# Altium PCB SPI-无WIFF3P6I.PCBDOC
Units mm, origin at the board's own origin, x right, y up, seen from the top; angles counter-clockwise.
Board outline 65.79 x 83.95 mm, 2 copper layers (Top Layer, Bottom Layer); 37 components, 28 nets, 131 pads, 33 vias.
Unrouted connection lines stored in the file: 2.
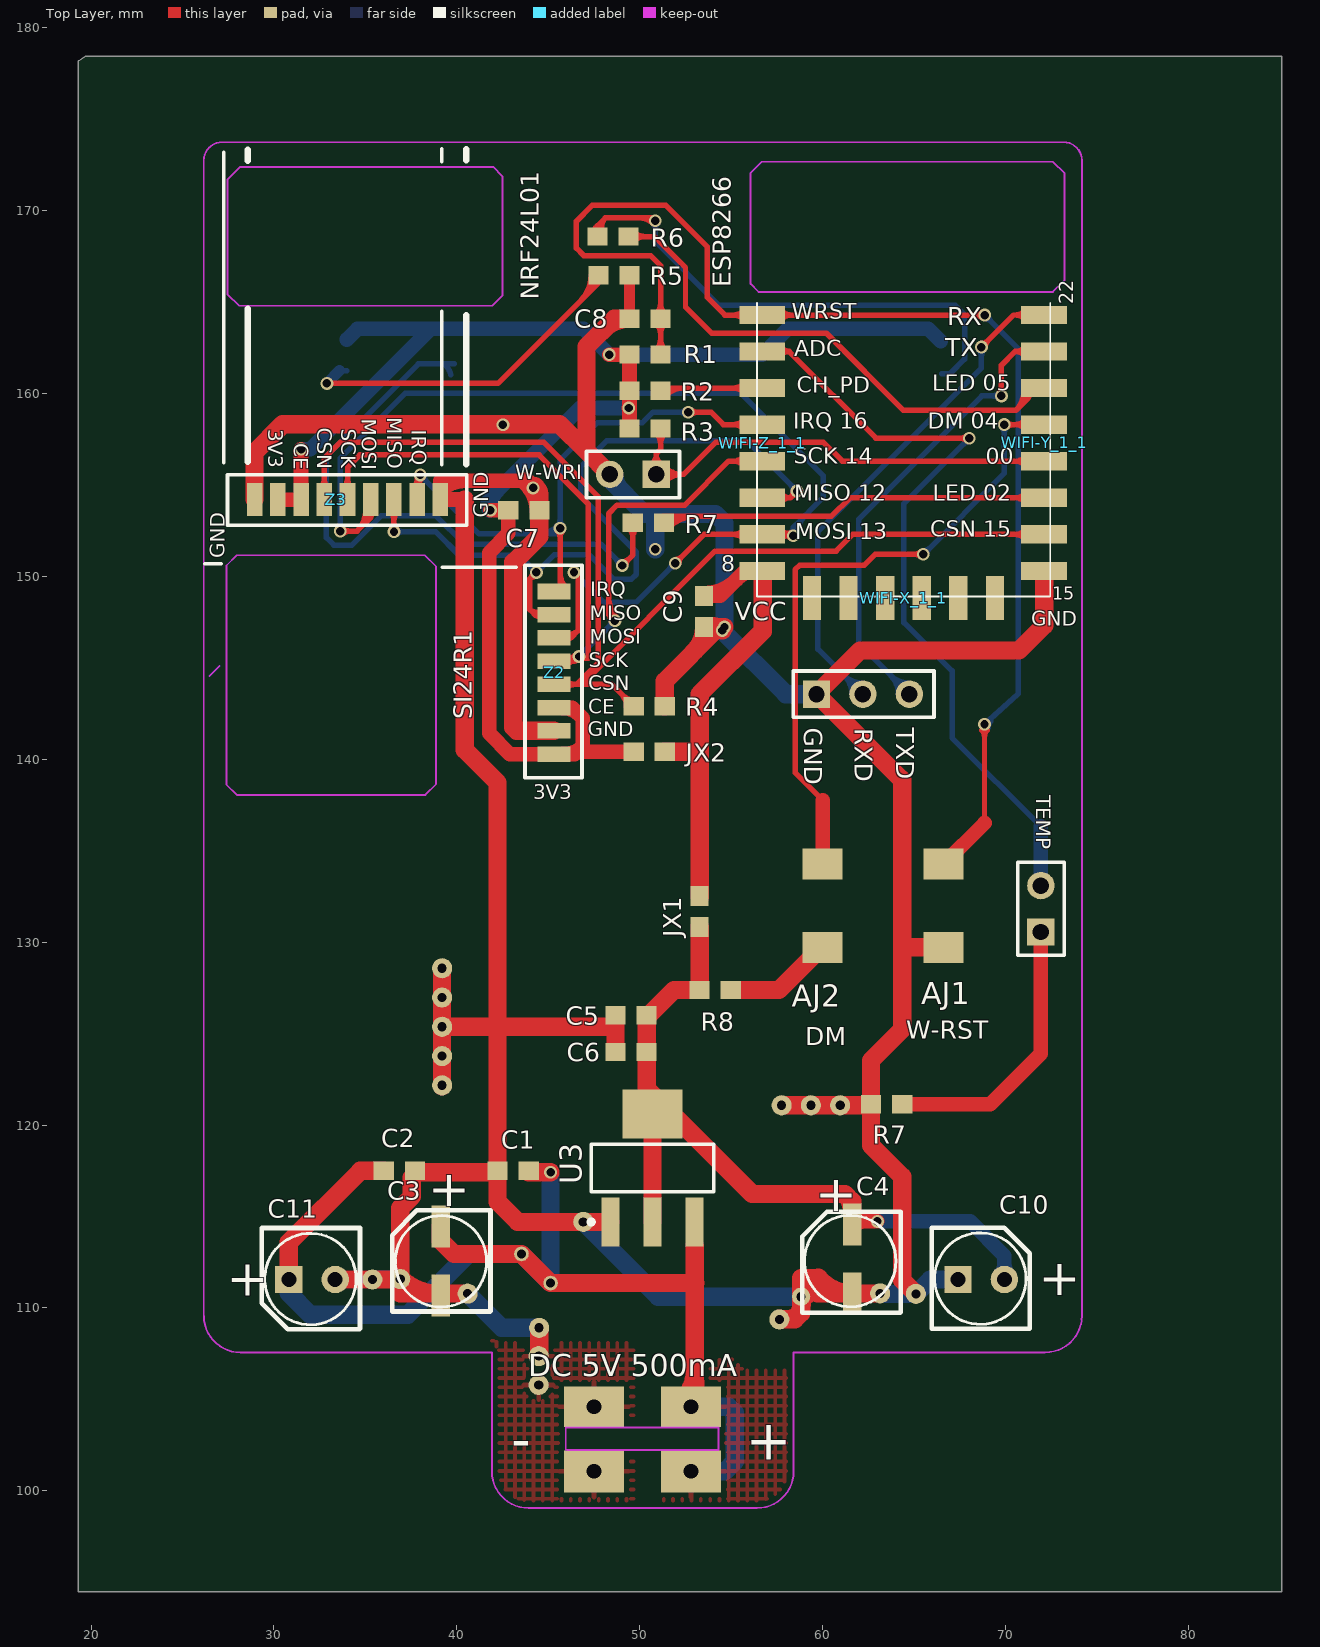
[diagram p0: Top Layer view]
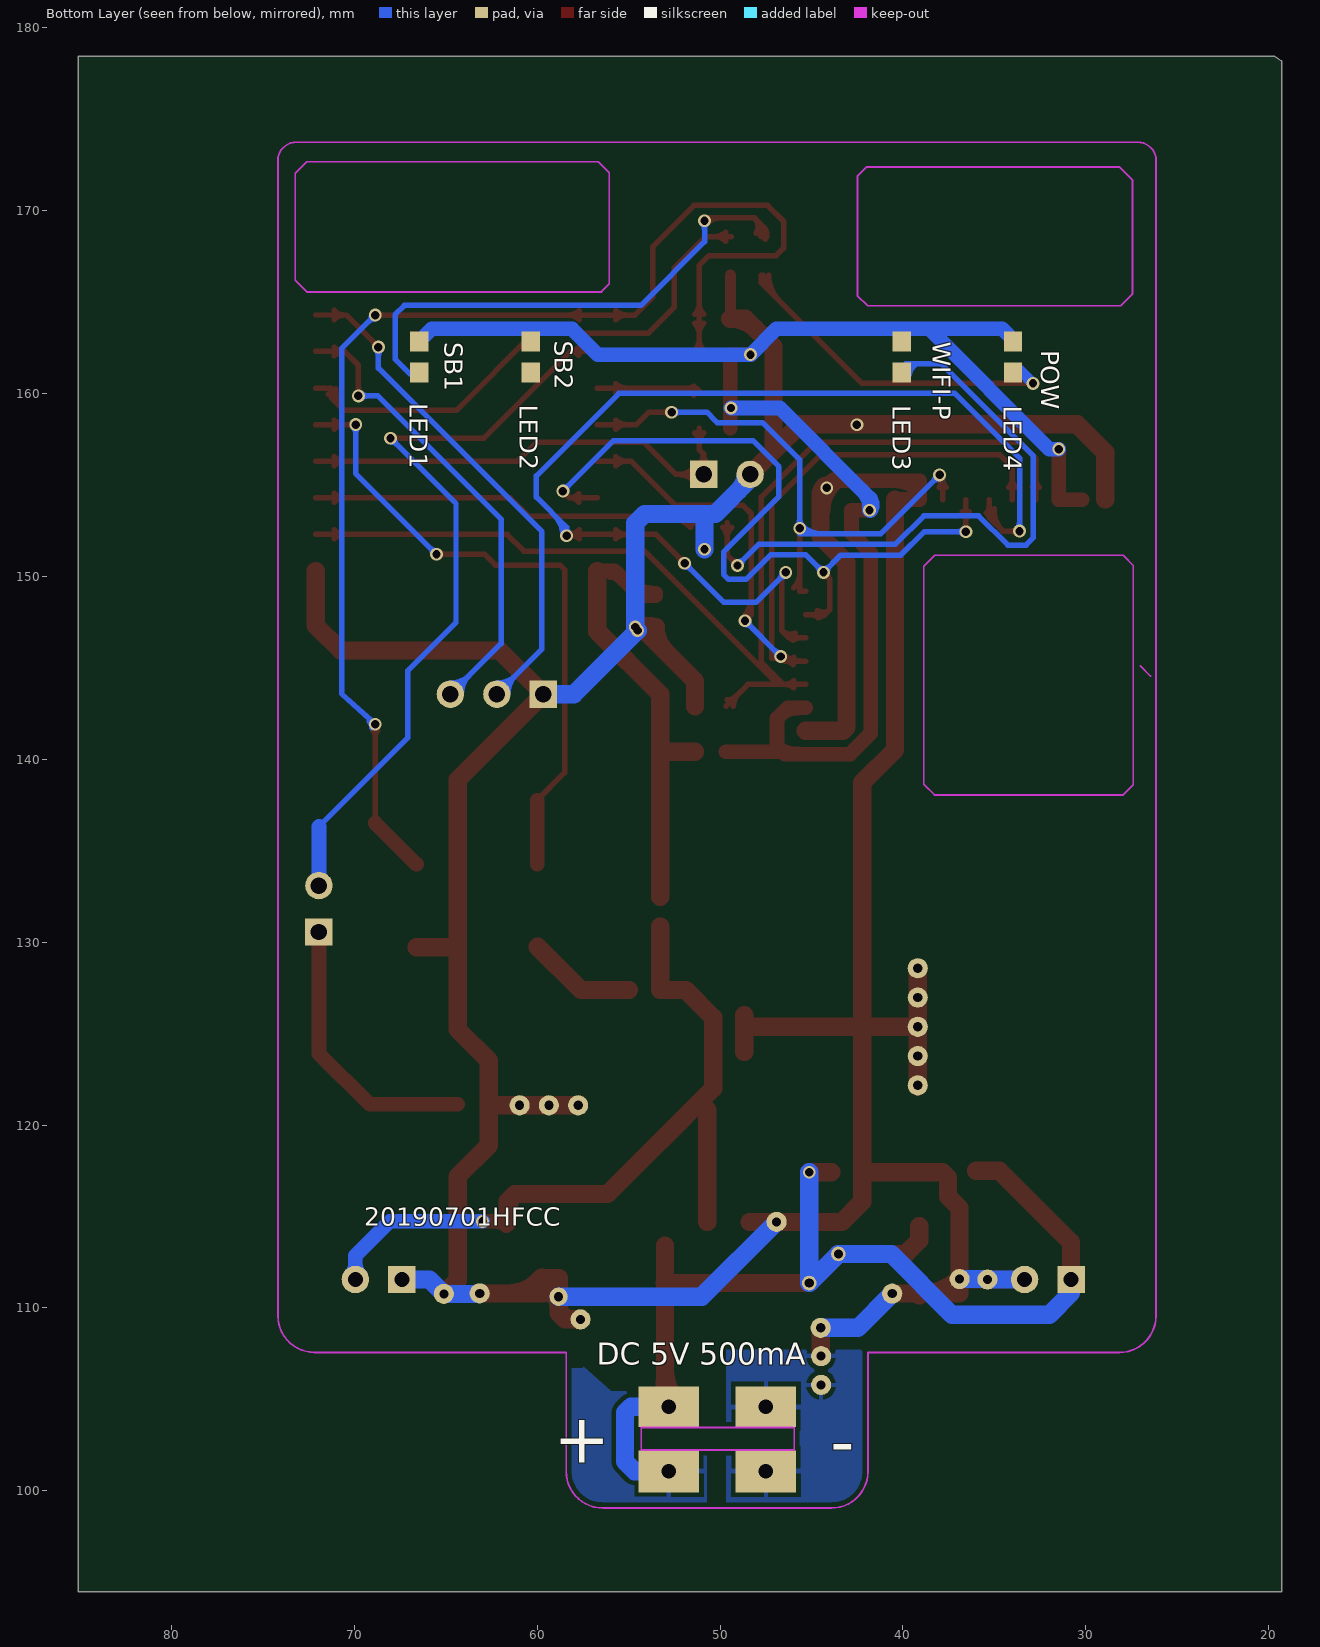
[diagram p1: Bottom Layer view, seen from below]

## Layer stack, top to bottom
Top Layer: signal copper 0.0356
Dielectric: dielectric 0.32, FR-4, Dk 4.8
Bottom Layer: signal copper 0.0356

## Board outline
19.685,178.435 85.09,178.435 85.09,94.488 19.304,94.488 19.304,178.181

## Design rules (kind name [scope] priority, off if disabled: settings)
Clearance [All] p1: gap=0.254
FabricationTestPointUsage TestPointUsage [All] p1: valid=0 allowmultiple=FALSE
FabricationTestpoint Testpoint [All] p1: side=3 testpointundercomponent=TRUE minsize=1.016 maxsize=2.54 preferedsize=1.524 minholesize=0 maxholesize=1.016 preferedholesize=0.813 testpointgrid=0.025 allowsidetop=TRUE allowsidebottom=TRUE usegrid=TRUE gridtolerance=0
PolygonConnect [All] p1: connectstyle=Relief reliefconductorwidth=0.254 reliefentries=4 polygonreliefangle="90 Angle"
RoutingVias [All] p1: holewidth=0.46 width=0.7 viastyle="Through Hole" minholewidth=0.4 minwidth=0.7 maxholewidth=0.8 maxwidth=1
SilkscreenOverComponentPads [All] p1: minsilkscreentomaskgap=0.254
SolderMaskExpansion [All] p1: expansion=0.102
Width Width_1 [InNet('3.3V')] p1: maxlimit=1 minlimit=0.254 preferedwidth=0.5 minimp=50.000000 maximp=50.000000 favimp=50.000000
Width Width_7 [InNet('3V3')] p2: maxlimit=1 minlimit=0.254 preferedwidth=0.8 minimp=50.000000 maximp=50.000000 favimp=50.000000
Width Width_4 [InNet('GND')] p3: maxlimit=1 minlimit=0.254 preferedwidth=1 minimp=50.000000 maximp=50.000000 favimp=50.000000
Width Width_3 [InNet('5V')] p4: maxlimit=1 minlimit=0.254 preferedwidth=1 minimp=50.000000 maximp=50.000000 favimp=50.000000
Width [All] p5: maxlimit=1 minlimit=0.254 preferedwidth=0.3 minimp=50.000000 maximp=50.000000 favimp=50.000000
25 further rules are at their usual default settings.

## Components (designator, comment, footprint, x,y, rotation, side; value= is the part's Value field where it differs from the comment)
AJ1 "3*4*2小龟按钮" HDR1X2#1 68.605,135.865 r90 top locked (schematic designator FW)
AJ2 "3*4*2小龟按钮" HDR1X2#1 62.001,135.865 r90 top (schematic designator FW)
C1 "10uf" CR1608-0603 43.078,117.5 r180 top
C2 "0.1uf" CR1608-0603 36.855,117.5 r0 top (schematic designator C3)
C3 "220uf" CC3216-1206 39.5,113.9 r270 top locked (schematic designator C6)
C4 "220uf" CC3216-1206 62,114 r270 top locked (schematic designator C3)
C5 "10uf" CR1608-0603 49.53,126 r180 top locked
C6 "0.1uf" CR1608-0603 49.53,124 r180 top (schematic designator C4)
C7 "0.01uf" CR1608-0603 43.663,153.619 r180 top
C8 "0.1uf" CR1608-0603 50.292,164.084 r180 top
C9 "0.01uf" CR1608-0603 53.518,148.082 r270 top
C10 "220uf" HDR1X2#2 67.4,111.557 r0 top locked (schematic designator C6)
C11 "220uf" HDR1X2#2 30.81,111.557 r0 top locked (schematic designator C6)
JX1 "0.1uf" CR1608-0603 53.264,131.674 r270 top (schematic designator C4)
JX2 "0.1uf" CR1608-0603 50.521,140.411 r180 top (schematic designator C4)
LED1 "SB1" CR1608-0603 66.456,162 r90 bottom locked
LED2 "SB2" CR1608-0603 60.36,162 r90 bottom
LED3 "WIFI-P" CR1608-0603 40.072,162 r90 bottom
LED4 "POW" CR1608-0603 33.985,162 r90 bottom locked
R1 "10K" CR1608-0603 50.292,162.128 r180 top
R2 "10K" CR1608-0603 50.292,160.147 r180 top
R3 "10K" CR1608-0603 50.292,158.09 r0 top
R4 "10K" CR1608-0603 50.521,142.9 r180 top
R5 "4.7K" CR1608-0603 48.59,166.472 r0 top
R6 "4.7K" CR1608-0603 48.539,168.58 r180 top
R7 "4.7K" CR1608-0603 63.5,121.133 r180 top
R7 "4.7K" CR1608-0603 50.47,152.933 r0 top
R8 "4.7K" CR1608-0603 54.127,127.381 r0 top
TEMP "" HDR1X2#3 71.933,130.556 r90 top
U3 "AMS1117-3.3" SOT223_M 50.698,117.653 r90 top locked (schematic designator U4)
W-WRI "" HDR1X2#3 50.902,155.575 r180 top
WIFI-X_1_1 "" MHDR1X8#1 59.959,148.815 r0 top
WIFI-Y_1_1 "" MHDR1X8#2 72.104,164.291 r270 top
WIFI-Z_1_1 "" MHDR1X8#3 56.706,164.287 r270 top locked
Z2 "SI24R1" MHDR1X8#4 45.314,149.174 r270 top
Z3 "NRF24L01" MHDR1X8#4 37.832,154.198 r180 top locked
? "" HDR1X4 59.665,143.561 r0 top

## Footprints (in the part's own frame and the unit in brackets; to place one, negate y for a bottom-side part, rotate by r counter-clockwise, add the part's x,y. Pads: shape width x height; smd on the part's side, far side on the other; paste and mask are expansions set on the pad)
CC3216-1206 [mm]
  rect 2.3x1 smd: 1(-0.562,-0.386) 2(3.213,-0.386)
CR1608-0603 [mm] "Chip Resistor; Body 1.6 x 0.8 mm (LxW typ)"
  rect 1.1x1 smd: 1(-0.85,0) 2(0.85,0)
HDR1X2#1 [mm]
  rect 1.7x2.2 smd: 1(-6.147,2.004) 2(-1.6,2.004)
HDR1X2#2 [mm] "Connector;"
  rect 1.5x1.5 hole 0.82: 1(0,0)
  round 1.5 hole 0.82: 2(2.54,0)
HDR1X2#3 [mm] "Connector; Header; 2 Position"
  rect 1.5x1.5 hole 0.9: 1(0,0)
  round 1.5 hole 0.9: 2(2.54,0)
  silkscreen extent -1.27,-1.27 3.81,1.27
HDR1X4 [mm] "Connector; Header; 3 Position"
  rect 1.5x1.5 hole 0.9: 1(0,0)
  round 1.5 hole 0.9: 2(2.54,0) 3(5.08,0)
  silkscreen extent -1.27,-1.27 6.43,1.27
MHDR1X8#1 [mm] "Connector; Header; 8 Position"
  rect 1x2.4 smd: 9(-0.54,0) 10(1.46,0) 11(3.46,0) 12(5.46,0) 13(7.46,0) 14(9.46,0)
MHDR1X8#2 [mm] "Connector; Header; 8 Position"
  rect 1x2.5 smd: 15(13.993,0) 16(11.993,0) 17(9.993,0) 18(7.993,0) 19(5.993,0) 20(3.993,0) 21(1.993,0) 22(0,0)
MHDR1X8#3 [mm] "Connector; Header; 8 Position"
  rect 1x2.5 smd: 1(0,0) 2(1.989,0) 3(3.989,0) 4(5.989,0) 5(7.989,0) 6(9.989,0) 7(11.989,0) 8(13.99,0)
MHDR1X8#4 [mm] "Connector; Header; 8 Position"
  rect 0.85x1.8 smd: 1(0,0) 2(1.27,0) 3(2.54,0) 4(3.81,0) 5(5.08,0) 6(6.35,0) 7(7.62,0) 8(8.89,0)
  silkscreen extent -1.43,-1.59 10.19,1.53
SOT223_M [mm] "SOT223, 4-Leads, Body 6.5x3.5mm, Pitch 2.3mm, Lead Span 7mm, IPC Low Dens"
  rect 2.7x1 smd: 1(-2.95,2.3) 2(-2.95,0) 3(-2.95,-2.3)
  rect 2.7x3.3 smd: 4(2.95,0)
  silkscreen extent -3.07,-3.35 1.3,3.47, body extent -1.85,-3.35 1.85,3.35, height 1.7

## Part data
C2 C6 JX1 JX2: library part "Cap Semi", "Capacitor (Semiconductor SI"
C3 C4: library part "Cap Pol1", "Polarized Capacitor (R"
C10 C11: library part "Cap Pol1", "Polarized Capacitor (Radial)"
U3: library part QNPN, "NPN Bipolar Transistor"

## Free pads (board coordinates)
  rect 0.85x1.8 smd: 0(39.091,154.203)
  rect 3.3x2.3 hole 0.8: 1(47.5,101.07) 1(52.8,101.07)
  rect 3.3x2.2 hole 0.8: 1(47.5,104.6) 1(52.8,104.6)
  round 1.1 hole 0.5: 5(35.382,111.557) 5(36.906,111.582) 5(40.589,110.787) 5(44.475,105.791) 5(44.475,107.366) 5(44.499,108.915) 5(57.633,109.372) 5(63.144,110.795) 5(65.1,110.769) 6(39.192,122.175) 6(46.914,114.706) 6(60.959,121.082) 7(39.192,123.775) 7(59.359,121.082) 8(39.192,125.375) 8(57.759,121.082) 9(39.192,126.975) 10(39.192,128.575)
  round 0.8 hole 0.5: 5(43.534,112.954) 5(45.124,111.363)
  round 1 hole 0.5: 5(58.826,110.617)

## Via types
v1: diameter 0.7, hole 0.46, Top Layer to Bottom Layer, 33 vias

## Nets (pads, with @x,y where several pads share a name; then routed paths per layer and width w, separated by ;. In a path a pad name is that pad's centre, name@x,y a point inside that pad or via, vN(x,y) a via of type N, cw(c..) or ccw(c..) an arc to the next point about the centre after c; other vN are vias at no path point)
3V3: C4.1 C5.1 C6.1 C7.2 C9.1 C10.2 JX1.1 JX1.2 JX2.1 JX2.2 LED1.2 LED2.2 LED3.2 LED4.2 R1.2 R2.2 R3.1 R8.1 U3.2 U3.4 WIFI-Z_1_1.8 Z2.6 Z2.8 Z3.6 Z3.7 | length 166.6
  Top Layer w0.8: Z3.7 Z3.6 v1(31.482,156.958) ; v1(41.834,153.619) C7.2 42.813,152.349 41.766,151.302 41.766,141.419 42.901,140.284 Z2.8 46.457,140.284 ; Z2.6 46.304,142.824 46.888,142.24 46.888,140.411 ; Z2.6@45.789,142.799 cw(c45.789,141.494) 46.711,142.417 ; Z2.8@45.79,140.309 ccw(c45.896,141.708) 46.888,140.716 ; 46.66,140.411 JX2.2@49.682,140.411 ; v1(48.336,162.128) R1.2 R2.2 v1@49.442,159.207 ; v1(49.403,159.207) v1@49.442,159.207 ; R3.1 v1@49.442,159.207 ; C9.1 54.407,148.932 55.772,150.297 WIFI-Z_1_1.8 WIFI-Z_1_1.8@56.718,150.297 ; C9.1@53.518,149.082 ccw(c53.518,151.59) 55.291,149.817 ; WIFI-Z_1_1.8@55.471,149.997 cw(c55.956,149.512) WIFI-Z_1_1.8@55.956,150.197 ; C4.1 61.614,114.732 v1(62.992,114.732) ; C4.1@61.685,114.491 cw(c62.265,113.911) 62.265,114.732
  Top Layer w1: U3.2 U3.4 50.698,120.828 U3.4@51.076,121.206 ; JX2.1 53.252,140.411 ; 53.269,119.114 50.38,122.004 C6.1 50.38,125.882 51.879,127.381 R8.1 JX1.2@53.277,130.861 ; JX1.1@53.277,132.486 53.277,143.561 56.718,147.002 WIFI-Z_1_1.8@56.718,150.297 ; 53.283,119.101 56.153,116.23 61.214,116.23 ; C4.1@61.614,114.732 61.614,115.83 61.214,116.23 ; C4.1@61.614,115.212 ccw(c60.246,115.263) 61.214,116.23
  Bottom Layer w0.8: v1(31.482,156.958) 31.99,156.958 38.567,163.535 ; LED4.2@33.985,162.95 34.57,163.535 46.929,163.535 v1(48.336,162.128) 56.693,162.128 58.1,163.535 65.771,163.535 LED1.2 ; v1@41.784,153.619 cw(c43.319,153.619) 42.233,154.705 ; v1@41.795,153.588 cw(c42.214,153.925) 41.834,154.305 ; v1(41.834,153.619) 41.834,154.305 ; v1(49.403,159.207) 46.736,159.207 41.834,154.305 ; v1(62.992,114.732) 68.072,114.732 69.94,112.864 C10.2 ; C10.2@69.693,111.804 ccw(c69.095,112.402) 69.94,112.402 ccw(c70.785,112.402) C10.2@70.188,111.804
5V: C1.1 C2.1 C3.1 C11.1 pad.1@52.8,101.07 pad.1@52.8,104.6 pad.5@43.534,112.954 pad.5@45.124,111.363 U3.3 | length 70
  Top Layer w1: C11.1 30.81,113.589 34.722,117.5 C2.1 ; C3.1 39.114,113.692 39.853,112.954 43.534,112.954 45.124,111.363 53.035,111.363 ; C1.1@43.928,117.424 v1(45.124,117.424) ; pad.1@52.376,105.024 ccw(c50.844,106.556) 53.01,106.556 ; pad.1@52.511,105.126 ccw(c52.049,105.969) 53.01,105.969 ; pad.1@52.534,105.138 ccw(c52.137,105.944) 53.035,105.944 ; pad.1@52.8,104.6 53.035,104.6 53.035,105.944 ; U3.3@53.01,113.42 53.01,105.969 ; 53.01,105.969 53.035,105.944
  Bottom Layer w1: C11.1 30.81,110.82 32.004,109.626 37.313,109.626 40.64,112.954 43.534,112.954 45.124,111.363 v1(45.124,117.424) ; pad.1@52.8,101.07 54.664,101.07 55.194,101.6 55.194,104.27 54.864,104.6 pad.1@52.8,104.6
ADC: TEMP.2 WIFI-Z_1_1.2 | length 44.9
  Top Layer w0.3: WIFI-Z_1_1.2 58.174,162.298 ; WIFI-Z_1_1.2@57.731,162.083 cw(c58.174,161.736) 58.174,162.298 ; WIFI-Z_1_1.2@57.731,162.514 ccw(c58.174,162.86) 58.174,162.298 ; v1@67.88,157.415 ccw(c67.538,157.073) 67.538,157.556 ccw(c67.538,158.039) v1@67.88,157.698 ; v1(68.021,157.556) 62.916,157.556 58.174,162.298
  Bottom Layer w0.3: v1@67.821,157.556 cw(c67.338,157.556) 67.68,157.215 cw(c68.021,156.873) v1@68.021,157.356 ; v1(68.021,157.556) 64.44,153.975 64.44,147.472 67.081,144.831 67.081,141.173 71.933,136.322
  Bottom Layer w0.8: TEMP.2 71.933,136.322
CH_PD: R2.1 WIFI-Z_1_1.3 | length 8.8
  Top Layer w0.3: R2.1 51.293,160.298 WIFI-Z_1_1.3 ; R2.1@51.227,160.112 cw(c51.678,159.661) R2.1@51.678,160.298 ; R2.1@51.439,159.9 cw(c52.402,158.937) 52.402,160.298 ; R2.1@51.439,160.394 ccw(c51.672,160.627) R2.1@51.672,160.298 ; WIFI-Z_1_1.3@55.708,160.051 ccw(c55.111,159.453) 55.111,160.298 ccw(c55.111,161.143) WIFI-Z_1_1.3@55.708,160.546
CS-W: WIFI-X_1_1.9
CSN: R4.2 WIFI-Y_1_1.16 Z2.5 Z3.5 | length 67.8
  Top Layer w0.3: Z3.5@32.558,154.868 ccw(c32.089,155.337) 32.752,155.337 ccw(c33.416,155.337) Z3.5@32.947,154.868 ; Z3.5 32.752,156.464 33.616,157.328 44.755,157.328 47.739,154.343 47.739,145.288 46.546,144.094 ; Z2.5 46.546,144.094 ; Z2.5@45.983,143.9 cw(c46.453,143.43) 46.453,144.094 cw(c46.453,144.758) Z2.5@45.983,144.289 ; 48.988,143.583 cw(c48.305,142.9) R4.2@49.271,142.9 ; 49.108,143.463 ccw(c49.621,143.975) R4.2@49.621,143.25 ; R4.2 48.477,144.094 46.838,144.094 ; WIFI-Y_1_1.16@71.106,152.051 ccw(c70.509,151.453) 70.509,152.298 ccw(c70.509,153.143) WIFI-Y_1_1.16@71.106,152.546 ; WIFI-Y_1_1.16 61.646,152.298 60.731,151.384 54.127,151.384 46.838,144.094 ; 46.546,144.094 46.838,144.094
GND: ?.1 AJ1.1 C1.2 C2.2 C3.2 C4.2 C5.2 C6.2 C7.1 C8.2 C9.2 C10.1 C11.2 pad.0 pad.1@47.5,101.07 pad.1@47.5,104.6 pad.5@35.382,111.557 pad.5@36.906,111.582 pad.5@40.589,110.787 pad.5@44.475,105.791 pad.5@44.475,107.366 pad.5@44.499,108.915 pad.5@57.633,109.372 pad.5@58.826,110.617 pad.5@63.144,110.795 pad.5@65.1,110.769 pad.6 pad.7 pad.8 pad.9 pad.10 R4.1 R5.2 R7.2@62.65,121.133 U3.1 W-WRI.2 WIFI-Y_1_1.15 Z2.7 Z3.8 | length 289.8
  Top Layer w0.6: 49.44,165.254 R5.2 ; C8.2 49.442,165.252
  Top Layer w0.8: pad.0@39.108,154.661 cw(c40.457,153.312) 40.457,155.219 ; 40.437,154.203 pad.0 39.091,155.219 43.725,155.219 cw(c43.725,154.704) v1@44.218,154.853 ; 43.371,155.219 cw(c43.371,154.039) v1@44.206,154.874
  Top Layer w1: Z3.8 28.942,156.781 30.48,158.318 45.618,158.318 47.084,156.853 ; C11.2 pad.5@36.906,111.557 ; pad.5@36.942,111.618 ccw(c38.928,113.604) C3.2@38.928,110.795 ; C3.2 C3.2@39.114,110.787 ; pad.6@39.192,122.116 39.192,122.175 39.192,123.775 pad.8@39.192,125.375 ; pad.10 pad.9 pad.8@39.192,125.375 ; 40.437,154.203 40.437,140.513 42.228,138.721 42.228,125.375 ; pad.5@40.589,110.787 C3.2@39.114,110.787 ; 43.725,155.219 44.513,154.432 C7.1 44.513,152.194 43.089,150.771 43.089,141.747 43.282,141.554 Z2.7 ; 43.852,155.092 cw(c42.379,153.619) C7.1@44.463,153.619 ; pad.5@44.475,107.366 44.499,107.366 pad.5@44.499,108.915 ; 48.054,163.53 cw(c49.392,162.191) C8.2@49.392,164.084 ; W-WRI.2 47.084,156.853 ; U3.1 43.336,114.703 42.228,115.81 C1.2@42.228,117.424 ; C6.2 48.68,125.349 ; C5.2 48.68,125.349 ; C8.2 48.608,164.084 47.084,162.56 47.084,156.853 ; R4.1 51.371,144.286 v1@54.317,147.232 ; 52.988,145.903 ccw(c51.709,147.182) 53.518,147.182 cw(c53.919,146.451) v1(54.508,147.041) v1@54.317,147.232 ; C9.2 v1@54.317,147.232 ; 54.111,147.026 cw(c54.508,146.629) v1@54.508,147.191 ; v1(54.635,147.232) v1@54.317,147.232 ; pad.5@57.633,109.372 58.471,109.372 ; pad.5@57.646,109.421 ccw(c57.974,110.58) 58.826,109.728 ; pad.8@57.759,121.082 59.359,121.082 60.959,121.082 pad.6@61.018,121.082 ; pad.5@58.826,110.283 cw(c60.216,110.283) 59.733,111.586 ; pad.7@59.41,121.082 R7.2@62.65,121.082 ; 59.754,111.665 ccw(c61.614,113.218) C4.2@61.614,110.795 ; C4.2 C4.2@61.614,110.795 ; pad.5@63.144,110.795 C4.2@61.614,110.795 ; pad.5@65.1,110.769 64.35,111.52 64.35,117.184 62.65,118.884 62.65,123.534 64.35,125.234 64.35,129.642 ; AJ1.1 64.426,129.718 64.35,129.642 ; WIFI-Y_1_1.15 72.111,150.298 72.111,147.32 70.739,145.948 62.052,145.948 ?.1 64.35,138.875 64.35,129.642 ; C3.2@39.114,110.787 39.114,110.795 36.906,110.795 36.906,115.468 37.539,116.101 37.539,117.117 37.846,117.424 C1.2@42.228,117.424 ; pad.8@39.192,125.375 42.228,125.375 ; C1.2@42.228,117.424 C1.2 42.228,125.375 ; 42.228,125.375 48.654,125.375 48.68,125.349 ; 58.471,109.372 ccw(c57.529,110.315) pad.5@58.826,110.617 ; 58.471,109.372 58.826,109.728 ; 58.826,109.728 pad.5@58.826,110.617 ; pad.5@58.826,110.617 ccw(c58.69,111.633) 59.715,111.633 ; pad.5@58.826,110.617 58.826,111.633 59.715,111.633 ; 59.715,111.633 59.715,110.795 C4.2@61.614,110.795 ; v1@44.277,154.944 cw(c43.707,154.375) 44.513,154.375 ccw(c43.707,154.375) v1@44.277,154.944
  Bottom Layer w1: C11.2 35.382,111.557 35.382,111.582 pad.5@36.906,111.582 ; pad.5@40.589,110.787 42.461,108.915 pad.5@44.499,108.915 ; pad.6@46.914,114.706 51.003,110.617 pad.5@58.826,110.617 ; W-WRI.2 48.362,155.321 50.267,153.416 54.127,153.416 54.635,152.908 v1(54.635,147.232) ; W-WRI.2@48.612,155.575 ccw(c49.828,155.575) 48.968,154.715 ; v1(50.851,151.486) 50.851,153.391 ; v1(54.508,147.041) 57.988,143.561 ?.1 ; pad.5@63.144,110.795 63.17,110.769 65.1,110.769 65.888,111.557 C10.1
  other v1: 44.171,154.838 42.52,158.293
GO0: R3.2 W-WRI.1 WIFI-Y_1_1.18 | length 31.4
  Top Layer w0.3: W-WRI.1@50.57,156.075 ccw(c50.161,156.693) 50.902,156.693 ; R3.2@50.894,157.842 cw(c50.297,157.245) 51.142,157.245 cw(c51.987,157.245) R3.2@51.389,157.842 ; R3.2 51.142,156.933 50.902,156.693 ; W-WRI.1@51.233,156.075 cw(c51.642,156.693) 50.902,156.693 ; W-WRI.1@51.326,155.151 cw(c52.35,154.126) 52.35,155.575 cw(c52.35,157.024) W-WRI.1@51.326,155.999 ; WIFI-Y_1_1.18@71.106,156.051 ccw(c70.509,155.453) 70.509,156.298 ccw(c70.509,157.143) WIFI-Y_1_1.18@71.106,156.546 ; WIFI-Y_1_1.18 61.075,156.298 60.046,157.328 54.153,157.328 52.4,155.575 W-WRI.1 50.902,156.693
GO2: R7.2@51.32,152.933 WIFI-Y_1_1.17 | length 25.6
  Top Layer w0.3: R7.2@51.32,152.933 51.32,153.289 60.477,153.289 61.487,154.298 WIFI-Y_1_1.17 ; R7.2@51.405,152.898 cw(c52.349,151.954) 52.349,153.289 ; R7.2@51.617,152.686 cw(c53.073,151.23) 53.073,153.289 ; WIFI-Y_1_1.17@71.106,154.051 ccw(c70.509,153.453) 70.509,154.298 ccw(c70.509,155.143) WIFI-Y_1_1.17@71.106,154.546
GO9: WIFI-X_1_1.11
GO10: WIFI-X_1_1.12
IRQ: WIFI-Z_1_1.4 Z2.1 Z3.1 | length 45.4
  Top Layer w0.3: Z3.1@37.638,154.868 ccw(c37.169,155.337) 37.832,155.337 ccw(c38.496,155.337) Z3.1@38.027,154.868 ; Z3.1@37.706,154.865 cw(c38.52,154.647) v1@38.098,155.376 ; Z3.1 37.832,155.384 v1(37.998,155.55) ; Z3.1@37.832,154.666 cw(c38.882,154.666) v1@38.14,155.408 ; Z2.1 45.644,149.174 v1(45.644,152.629) ; v1@45.502,152.487 cw(c45.161,152.146) 45.644,152.146 cw(c46.127,152.146) v1@45.785,152.487 ; 45.644,150.188 ccw(c46.802,150.188) Z2.1@45.983,149.369 ; v1(52.654,158.979) 53.899,158.979 54.579,158.298 WIFI-Z_1_1.4 ; v1@52.796,158.837 cw(c53.137,158.496) 53.137,158.979 cw(c53.137,159.461) v1@52.796,159.12 ; WIFI-Z_1_1.4@55.708,158.051 ccw(c55.111,157.453) 55.111,158.298 ccw(c55.111,159.143) WIFI-Z_1_1.4@55.708,158.546
  Bottom Layer w0.3: v1@37.998,155.35 cw(c37.998,154.867) 38.34,155.208 cw(c38.681,155.55) v1@38.198,155.55 ; v1(37.998,155.55) 41.224,152.324 45.644,152.324 v1(45.644,152.629) ; 44.425,152.324 ccw(c44.425,153.847) v1@45.502,152.77 ; 45.149,152.324 ccw(c45.149,153.123) v1@45.715,152.558 ; 45.657,153.081 ccw(c46.096,153.081) 45.785,152.77 cw(c46.127,153.111) 45.644,153.111 cw(c45.161,153.111) v1@45.502,152.77 ; 45.657,153.142 cw(c45.13,153.142) v1@45.502,152.77 ; 45.657,156.375 45.657,152.641 45.644,152.654 45.644,156.362 47.685,158.403 50.151,158.403 ; 50.244,158.496 50.726,158.979 v1(52.654,158.979) ; v1@52.513,158.837 ccw(c52.171,158.496) 52.171,158.979 ccw(c52.171,159.461) v1@52.513,159.12
LED1: R6.1 WIFI-Y_1_1.20 | length 32.8
  Top Layer w0.3: R6.1 50.8,168.58 52.502,166.878 52.502,164.719 53.924,163.297 60.198,163.297 64.414,159.08 70.561,159.08 ; R6.1@49.687,168.332 cw(c50.284,167.735) 50.284,168.58 cw(c50.284,169.425) R6.1@49.687,168.827 ; WIFI-Y_1_1.20@71.005,160.273 cw(c69.481,160.161) 70.561,159.08 ; 71.025,159.544 ccw(c70.344,160.224) WIFI-Y_1_1.20@71.304,160.295 ; WIFI-Y_1_1.20@71.121,160.037 cw(c70.87,159.755) 71.247,159.755 cw(c71.448,159.755) WIFI-Y_1_1.20@71.414,159.953 ; WIFI-Y_1_1.20 71.247,160.298 71.247,159.766 70.561,159.08
MISO: WIFI-Z_1_1.6 Z2.2 Z3.2 | length 53.1
  Top Layer w0.3: Z3.2@36.368,153.529 cw(c35.899,153.06) 36.562,153.06 cw(c37.226,153.06) Z3.2@36.757,153.529 ; v1@36.421,152.58 ccw(c36.08,152.922) 36.562,152.922 ccw(c37.045,152.922) v1@36.704,152.58 ; v1(36.562,152.439) Z3.2 ; v1@44.148,150.216 cw(c43.666,150.216) 44.007,149.874 cw(c44.348,149.533) v1@44.348,150.016 ; 44.243,147.934 ccw(c44.577,148.268) Z2.2@44.853,147.884 ; v1(44.348,150.216) 43.993,149.86 43.993,148.184 ; Z2.2@44.622,147.734 ccw(c44.272,147.458) 44.272,147.904 ; Z2.2@44.622,148.074 cw(c44.272,148.35) 44.272,147.904 ; Z2.2@44.678,148.128 cw(c44.368,148.559) 43.993,148.184 ; Z2.2 44.272,147.904 ; WIFI-Z_1_1.6 58.235,154.298 ; WIFI-Z_1_1.6@57.717,154.066 cw(c58.235,153.605) 58.235,154.298 ; WIFI-Z_1_1.6@57.717,154.531 ccw(c58.235,154.992) 58.235,154.298 ; v1@58.398,154.661 cw(c57.915,154.661) 58.256,154.319 cw(c58.598,153.978) v1@58.598,154.461 ; v1(58.598,154.661) 58.235,154.298 ; 43.993,148.184 44.272,147.904
  Bottom Layer w0.3: v1(36.562,152.439) 38.848,152.439 40.132,151.155 43.409,151.155 v1(44.348,150.216) 45.314,151.181 47.244,151.181 48.59,149.835 49.53,149.835 49.809,150.114 49.809,151.333 46.787,154.356 46.787,156.007 48.209,157.429 55.829,157.429 v1(58.598,154.661) ; v1@36.704,152.298 cw(c37.045,151.956) 37.045,152.439 cw(c37.045,152.922) v1@36.704,152.58 ; v1@44.148,150.216 ccw(c43.666,150.216) 44.007,150.557 ccw(c44.348,150.898) 44.348,150.416 ccw(c44.348,150.898) 44.69,150.557 ccw(c45.031,150.216) v1@44.548,150.216 ; v1@58.398,154.661 ccw(c57.915,154.661) 58.256,155.002 ccw(c58.598,155.343) v1@58.598,154.861
MISO-W: WIFI-X_1_1.10
MOSI: WIFI-Z_1_1.7 Z2.3 Z3.3 | length 74.8
  Top Layer w0.3: v1(33.63,152.476) 34.544,152.476 ; v1@33.771,152.335 cw(c34.112,151.993) 34.112,152.476 cw(c34.112,152.959) v1@33.771,152.618 ; Z3.3@35.018,153.709 cw(c33.395,153.625) 34.544,152.476 ; 35.021,152.953 ccw(c34.302,153.672) Z3.3@35.317,153.725 ; Z3.3@35.146,153.491 cw(c34.978,153.225) 35.292,153.225 ; Z3.3 35.292,153.225 ; Z3.3@35.439,153.491 ccw(c35.607,153.225) 35.292,153.225 ; Z2.3 46.228,146.634 ; Z2.3@45.779,146.611 ccw(c45.965,147.066) 46.312,146.718 ; Z2.3@45.893,146.889 ccw(c46.15,147.519) 46.631,147.037 ; Z2.3@46.036,146.514 cw(c46.228,146.421) 46.228,146.634 ; Z2.3@46.036,146.754 ccw(c46.228,146.848) 46.228,146.634 ; v1(46.406,150.216) 46.631,149.99 46.631,147.038 ; v1(51.943,150.724) 53.518,152.298 WIFI-Z_1_1.7 58.319,152.298 v1(58.395,152.222) ; v1@51.943,150.924 ccw(c51.943,151.406) 52.285,151.065 ccw(c52.626,150.724) v1@52.143,150.724 ; WIFI-Z_1_1.7@55.708,152.051 ccw(c55.111,151.453) 55.111,152.298 ccw(c55.111,153.143) WIFI-Z_1_1.7@55.708,152.546 ; WIFI-Z_1_1.7@57.703,152.051 cw(c58.301,151.453) 58.301,152.298 cw(c58.301,153.143) WIFI-Z_1_1.7@57.703,152.546 ; WIFI-Z_1_1.7@57.728,152.298 cw(c57.728,151.556) v1@58.253,152.081 ; WIFI-Z_1_1.7@57.826,152.425 cw(c57.658,151.797) v1@58.221,152.122 ; 58.055,152.364 ccw(c58.137,152.668) v1@58.295,152.395 ; 34.544,152.476 35.292,153.225 ; 46.228,146.634 46.631,147.038
  Bottom Layer w0.3: v1@33.488,152.618 ccw(c33.147,152.959) 33.63,152.959 ccw(c34.112,152.959) v1@33.771,152.618 ; v1(33.63,152.476) 33.63,156.464 37.186,160.02 49.307,160.02 49.316,160.011 55.533,160.011 60.046,155.499 60.046,154.33 58.395,152.679 ; v1@46.406,150.016 cw(c46.406,149.533) 46.747,149.874 cw(c47.089,150.216) v1@46.606,150.216 ; v1(46.406,150.216) 48.047,148.574 49.794,148.574 v1(51.943,150.724) ; v1@51.743,150.724 cw(c51.26,150.724) 51.602,150.382 cw(c51.943,150.041) v1@51.943,150.524 ; v1@58.259,152.369 ccw(c57.972,152.679) 58.395,152.679 ; v1@58.295,152.222 cw(c59.157,152.222) 58.547,152.832 ; v1(58.395,152.222) 58.395,152.679 ; v1@58.53,152.369 cw(c58.817,152.679) 58.395,152.679 ; v1@58.595,152.222 cw(c60.181,152.222) 59.059,153.344
MOSI-W: WIFI-X_1_1.13
R5: LED4.1 R5.1 | length 21.5
  Top Layer w0.3: v1(32.893,160.553) 42.24,160.553 47.74,166.053 R5.1 ; 46.762,165.075 ccw(c45.365,166.472) R5.1@47.34,166.472 ; 47.274,165.587 ccw(c46.389,166.472) R5.1@47.64,166.472
  Bottom Layer w0.3: LED4.1@33.59,161.25 LED4.1@33.985,161.25
  Bottom Layer w0.6: v1(32.893,160.553) LED4.1@33.59,161.25
R6: LED1.1 R6.2 | length 32.3
  Top Layer w0.3: R6.2@47.523,168.888 ccw(c47.371,169.167) 47.689,169.167 ; R6.2@47.53,168.443 cw(c47.951,168.718) R6.2@47.595,169.073 ; R6.2 47.689,169.167 ; R6.2@47.781,168.607 cw(c48.267,168.924) 47.857,169.335 ; R6.2@47.856,168.888 cw(c48.007,169.167) 47.689,169.167 ; R6.2@48.032,168.771 cw(c48.583,169.131) 48.118,169.596 ; 50,169.596 cw(c50,168.593) v1@50.709,169.302 ; v1(50.851,169.443) 50.698,169.596 48.118,169.596 ; 47.689,169.167 48.118,169.596
  Bottom Layer w0.3: v1@50.709,169.302 cw(c50.368,168.961) 50.851,168.961 cw(c51.334,168.961) v1@50.992,169.302 ; v1(50.851,169.443) 50.851,168.3 54.331,164.821 67.259,164.821 67.767,164.313 67.767,161.874 66.978,161.085 LED1.1@66.521,161.085
R7: LED3.1 R7.1@49.62,152.933 | length 37.8
  Top Layer w0.3: v1(49.047,150.597) 49.62,151.169 R7.1@49.62,152.933 ; v1@49.047,150.797 ccw(c49.047,151.279) 49.389,150.938 ccw(c49.73,150.597) v1@49.247,150.597 ; R7.1@49.372,152.686 cw(c48.775,152.088) 49.62,152.088 cw(c50.465,152.088) R7.1@49.867,152.686
  Bottom Layer w0.3: 39.268,161.62 cw(c38.823,160.902) LED3.1@39.661,161.012 ; LED3.1@39.857,161.62 37.897,161.62 32.868,156.591 32.868,152.121 33.274,151.714 34.265,151.714 35.865,153.314 38.862,153.314 40.411,151.765 47.879,151.765 v1(49.047,150.597) ; v1@48.847,150.597 ccw(c48.365,150.597) 48.706,150.938 ccw(c49.047,151.279) v1@49.047,150.797
R8: AJ2.1 R8.2 | length 6
  Top Layer w1: R8.2 57.607,127.381 AJ2.1@59.971,129.745
RXD: ?.2 WIFI-Y_1_1.22 | length 33
  Top Layer w0.3: v1(68.682,162.535) 70.438,164.291 WIFI-Y_1_1.22 ; v1@68.682,162.735 ccw(c68.682,163.217) 69.023,162.876 ccw(c69.364,162.535) v1@68.882,162.535 ; WIFI-Y_1_1.22@71.106,164.044 ccw(c70.509,163.446) 70.509,164.291 ccw(c70.509,165.136) WIFI-Y_1_1.22@71.106,164.539
  Bottom Layer w0.3: ?.2@61.605,143.561 ccw(c60.156,143.561) 61.18,144.585 ccw(c62.205,145.609) ?.2@62.205,144.161 ; ?.2 59.741,146.025 59.741,152.451 68.682,161.392 v1(68.682,162.535) ; v1@68.54,162.393 cw(c68.199,162.052) 68.682,162.052 cw(c69.164,162.052) v1@68.823,162.393
SCK: WIFI-Z_1_1.5 Z2.4 Z3.4 | length 59.1
  Top Layer w0.3: Z3.4@33.828,154.868 ccw(c33.359,155.337) 34.022,155.337 ccw(c34.686,155.337) Z3.4@34.217,154.868 ; Z3.4 34.022,155.968 34.696,156.642 44.501,156.642 47.185,153.957 47.185,145.534 46.697,145.49 v1@46.543,145.476 ; Z2.4@45.589,145.364 ccw(c45.589,146.714) v1@46.544,145.76 ; Z2.4@45.906,145.418 ccw(c45.822,146.337) v1@46.532,145.746 ; Z2.4@45.965,145.575 ccw(c46.296,145.973) 46.343,145.458 ; Z2.4@45.988,145.174 cw(c46.431,144.751) 46.431,145.364 ; Z2.4@45.988,145.554 ccw(c46.431,145.977) 46.431,145.364 ; Z2.4@46,145.188 cw(c46.622,144.669) v1@46.549,145.476 ; Z2.4@46.067,145.299 ccw(c45.798,146.028) v1@46.504,145.702 ; Z2.4@46.131,145.284 ccw(c46.001,145.766) v1@46.49,145.661 ; 46.313,145.364 ccw(c46.313,145.99) v1@46.756,145.547 ; v1@46.49,145.572 cw(c46.274,145.522) 46.431,145.364 ; v1@46.639,145.423 ccw(c46.589,145.207) 46.431,145.364 ; v1(46.685,145.618) v1@46.543,145.476 ; 48.293,148.172 ccw(c49.239,148.172) v1@48.57,147.503 ; 48.293,148.896 ccw(c49.963,148.896) v1@48.782,147.715 ; v1@48.441,147.574 ccw(c47.958,147.574) 48.3,147.915 ccw(c48.641,148.257) v1@48.641,147.774 ; v1(48.641,147.574) 48.293,147.922 48.293,153.424 48.768,153.899 52.464,153.899 54.864,156.298 WIFI-Z_1_1.5 ; WIFI-Z_1_1.5@55.708,156.051 ccw(c55.111,155.453) 55.111,156.298 ccw(c55.111,157.143) WIFI-Z_1_1.5@55.708,156.546 ; 46.431,145.364 v1@46.543,145.476 ; 46.431,145.364 Z2.4 v1@46.543,145.476
  Bottom Layer w0.3: v1(46.685,145.618) v1(48.641,147.574) ; v1@46.685,145.818 ccw(c46.685,146.301) 47.027,145.96 ccw(c47.368,145.618) v1@46.885,145.618 ; v1@48.441,147.574 cw(c47.958,147.574) 48.3,147.233 cw(c48.641,146.891) v1@48.641,147.374
SCK-W: WIFI-X_1_1.14
TEMP: R7.1@64.35,121.133 TEMP.1 | length 15.4
  Top Layer w0.8: R7.1@64.35,121.133 69.164,121.133 71.933,123.901 TEMP.1
TXD: ?.3 WIFI-Y_1_1.21 | length 30.7
  Top Layer w0.3: v1@69.632,160.009 ccw(c69.291,160.35) 69.774,160.35 ccw(c70.257,160.35) v1@69.915,160.009 ; v1(69.774,159.868) 69.774,161.544 70.528,162.298 ; WIFI-Y_1_1.21@71.102,162.055 ccw(c70.528,161.499) 70.528,162.298 ; WIFI-Y_1_1.21@71.102,162.542 cw(c70.528,163.097) 70.528,162.298 ; WIFI-Y_1_1.21 70.528,162.298
  Bottom Layer w0.3: ?.3@64.145,143.561 ccw(c62.696,143.561) 63.72,144.585 ccw(c64.745,145.609) ?.3@64.745,144.161 ; ?.3 61.976,146.329 61.976,153.137 68.707,159.868 v1(69.774,159.868) ; v1@69.632,159.726 ccw(c69.291,159.385) 69.291,159.868 ccw(c69.291,160.35) v1@69.632,160.009
WRST: AJ1.2 C8.1 R1.1 WIFI-Z_1_1.1 | length 80.3
  Top Layer w0.3: R1.1@50.894,162.376 ccw(c50.297,162.973) 51.142,162.973 ccw(c51.987,162.973) R1.1@51.389,162.376 ; C8.1@50.894,163.837 cw(c50.297,163.239) 51.142,163.239 cw(c51.987,163.239) C8.1@51.389,163.837 ; C8.1@50.894,164.331 ccw(c50.297,164.929) 51.142,164.929 ccw(c51.987,164.929) C8.1@51.389,164.331 ; R1.1 C8.1 51.142,166.993 50.597,167.538 46.939,167.538 46.533,167.945 46.533,169.418 47.396,170.282 51.435,170.282 53.696,168.021 53.696,165.252 54.661,164.287 WIFI-Z_1_1.1 v1(68.859,164.287) ; WIFI-Z_1_1.1@55.708,164.04 ccw(c55.111,163.442) 55.111,164.287 ccw(c55.111,165.132) WIFI-Z_1_1.1@55.708,164.535 ; WIFI-Z_1_1.1@57.703,164.04 cw(c58.301,163.442) 58.301,164.287 cw(c58.301,165.132) WIFI-Z_1_1.1@57.703,164.535 ; 68.709,141.591 cw(c68.367,141.249) 68.85,141.249 cw(c69.333,141.249) 68.991,141.591 ; v1@68.718,164.146 ccw(c68.377,163.804) 68.377,164.287 ccw(c68.377,164.77) v1@68.718,164.429 ; 68.85,136.513 v1(68.85,141.92)
  Top Layer w0.8: AJ1.2 68.85,136.513
  Bottom Layer w0.3: v1(68.85,141.92) 70.688,143.57 70.688,162.458 v1(68.859,164.287) ; v1@68.85,141.932 ccw(c68.85,142.415) 69.191,142.073 ccw(c69.533,141.732) v1@69.05,141.732 ; v1@68.859,164.087 cw(c68.859,163.604) 69.201,163.946 cw(c69.542,164.287) v1@69.059,164.287
XHDM: AJ2.2 WIFI-Y_1_1.19 | length 39.5
  Top Layer w0.3: 59.997,137.767 58.496,139.268 58.496,150.368 58.75,150.622 62.281,150.622 62.865,151.206 v1(65.507,151.206) ; v1@65.365,151.065 ccw(c65.024,150.723) 65.024,151.206 ccw(c65.024,151.689) v1@65.365,151.348 ; v1(69.926,158.298) WIFI-Y_1_1.19 ; v1@70.068,158.157 cw(c70.409,157.815) 70.409,158.298 cw(c70.409,158.781) v1@70.068,158.44 ; WIFI-Y_1_1.19@71.106,158.051 ccw(c70.509,157.453) 70.509,158.298 ccw(c70.509,159.143) WIFI-Y_1_1.19@71.106,158.546
  Top Layer w0.8: AJ2.2 59.997,137.767
  Bottom Layer w0.3: v1(65.507,151.206) 69.926,155.626 v1(69.926,158.298) ; v1@65.507,151.406 ccw(c65.507,151.889) 65.848,151.548 ccw(c66.189,151.206) v1@65.707,151.206 ; v1@69.785,158.157 cw(c69.443,157.815) 69.926,157.815 cw(c70.409,157.815) v1@70.068,158.157
pads on no net: LED2.1

## Polygon pours and split planes (outlines as drawn)
GND on Bottom Layer "Top Layer-No Net" (solid, remove dead copper, pour order 16): 91.923,105.105 91.923,112.116 93.32,113.513 93.828,113.513 98.374,113.513 99.619,114.757 99.67,114.808 99.67,130.886 102.718,130.886 102.819,130.988 104.47,132.639 104.47,133.045 104.47,151.257 104.496,151.282 103.353,152.425 99.822,152.425 99.822,156.82 99.797,156.845 99.847,156.896 102.235,156.896 137.414,156.896 137.439,156.921 137.433,156.915 137.433,107.105 137.433,106.14 136.957,105.664 136.398,105.105 135.839,105.105 135.433,105.105
GND on Bottom Layer "Top Layer-No Net" (solid, remove dead copper, pour order 8): 42.262,107.716 49.629,107.716 49.682,107.769 49.656,107.743 49.656,99.088 44.03,99.088 43.949,99.009 43.896,99.062 43.146,99.062 42.986,99.062 42.236,99.801 41.84,100.19 41.84,100.988 41.84,107.842 41.834,107.848
5V on Bottom Layer "Top Layer-No Net" (solid, remove dead copper, pour order 9): 50.777,105.371 50.858,105.442 54.878,105.442 55.95,105.442 57.451,106.782 57.531,106.71 58.496,106.71 58.496,100.922 58.463,100.892 58.443,100.874 58.443,99.918 58.067,99.918 57.317,99.248 57.049,99.009 56.353,99.009 50.858,99.009 50.777,99.081 50.724,99.129 50.724,105.084
GND on Top Layer "Top Layer-No Net" (hatched 90Degree grid 0.508 track 0.203, remove dead copper, pour order 14): 95.85,107.137 95.875,107.163 95.875,114.071 95.875,114.402 96.84,115.367 96.917,115.443 102.555,115.443 102.555,115.875 103.47,116.789 103.622,116.942 103.622,132.944 106.778,132.944 108.245,134.41 108.372,134.537 108.372,153.01 108.169,153.01 106.492,154.686 106.289,154.889 103.749,154.889 103.749,158.699 103.927,158.877 104.054,158.75 141.316,158.75 141.316,109.144 141.309,109.137 141.24,109.068 141.24,108.28 141.214,108.28 140.655,107.721 140.173,107.239 140.02,107.239 139.411,107.239 139.309,107.137 95.875,107.137
GND on Top Layer "Top Layer-No Net" (hatched 90Degree grid 0.508 track 0.203, remove dead copper, pour order 7): 42.334,108.094 49.629,108.094 49.682,108.15 49.656,108.122 49.656,99.035 44.085,99.035 44.005,98.952 43.952,99.007 43.21,99.007 43.051,99.007 42.308,99.783 41.916,100.192 41.916,101.029 41.916,108.226 41.91,108.233
5V on Top Layer "Top Layer-No Net" (hatched 90Degree grid 0.508 track 0.203, remove dead copper, pour order 10): 51.105,107.151 51.105,98.517 51.185,98.44 51.266,98.517 56.678,98.517 57.697,98.517 58.259,99.06 58.742,99.525 58.742,99.887 58.742,100.74 58.903,100.895 58.869,100.927 58.869,106.582 55.687,106.582 55.017,107.228 54.937,107.151 51.185,107.151

## Keep-outs
Keep-Out Layer:
  lines w0.1: 26.16,109.569 26.16,172.741 ; 26.162,172.741 cw(c27.162,172.741) 27.162,173.741 ; 26.169,109.569 ccw(c28.169,109.569) 28.169,107.569 41.91,107.569 ; 26.467,144.551 27.026,145.11 ; 27.162,173.74 73.177,173.74 ; 41.916,100.965 41.916,107.569 ; 41.916,101.06 ccw(c43.916,101.06) 43.916,99.06 56.414,99.06 ccw(c56.414,101.06) 58.414,101.06 58.414,107.569 ; 45.95,102.235 45.95,103.465 ; 46.017,102.235 54.313,102.235 54.313,103.465 46.017,103.465 ; 58.42,107.569 72.168,107.569 ; 72.177,107.576 ccw(c72.177,109.576) 74.177,109.576 74.177,172.741 ccw(c73.177,172.741) 73.177,173.741 ; 27.407,138.608 27.965,138.049 38.278,138.049 38.862,138.633 38.862,150.546 38.252,151.155 27.965,151.155 27.407,150.597 27.407,138.608 ; 27.457,165.43 28.092,164.795 41.935,164.795 42.494,165.354 42.494,171.882 41.986,172.39 28.169,172.39 27.457,171.679 27.457,165.43 ; 56.058,165.989 56.492,165.554 72.59,165.554 73.228,166.192 73.228,172.034 72.593,172.669 56.667,172.669 56.058,172.06 56.058,165.989

## Silkscreen, mask and mechanical layers (free items; w line width, h text height)
Top Overlay:
  circle w0.16: c39.131,112.547 r2.5
  circle w0.16: c61.508,112.567 r2.5
  circle w0.16: c31.993,111.582 r2.5
  circle w0.16: c68.62,111.608 r2.5
  lines w0.1: 56.413,164.948 56.413,148.895 72.441,148.895 72.441,164.948
  lines w0.2: 26.213,150.698 27.102,150.698 ; 27.254,156.21 27.254,173.177 ; 39.167,156.108 39.167,164.49 ; 39.167,172.669 39.167,173.38 ; 39.218,150.495 43.231,150.495
  lines w0.254: 34.681,108.844 30.754,108.844 29.331,110.267 29.331,114.369 34.706,114.369 34.706,108.869 ; 36.468,109.809 41.818,109.809 ; 36.468,109.884 36.468,113.984 37.818,115.334 41.843,115.334 41.843,109.834 ; 58.889,109.732 64.239,109.732 ; 58.889,109.807 58.889,113.907 60.239,115.257 64.264,115.257 64.264,109.757 ; 65.958,108.869 71.308,108.869 ; 65.958,108.944 65.958,114.394 69.933,114.394 71.333,112.995 71.333,108.894
  lines w0.35: 28.575,156.261 28.575,164.643 ; 28.575,172.72 28.575,173.33 ; 40.513,156.134 40.513,164.287 ; 40.513,172.745 40.513,173.355
  text "ESP8266" at 54.966,165.811 h1 r90
  text "22" at 73.965,164.871 h1.3 r90
  text "WRST" at 58.318,163.754 h1.5
  text "RX" at 66.802,163.728 h1
  text "TX" at 66.7,162.027 h1
  text "ADC" at 58.445,161.722 h1.5
  text "LED 05" at 65.989,159.842 h1.5
  text "CH_PD" at 58.598,159.741 h1.5
  text "MISO" at 36.195,158.699 h0.8 r270
  text "MOSI" at 34.798,158.623 h0.8 r270
  text "CSN" at 32.36,158.14 h0.8 r270
  text "SCK" at 33.68,158.064 h0.8 r270
  text "3V3" at 29.693,158.039 h0.8 r270
  text "IRQ" at 37.541,158.013 h0.8 r270
  text "IRQ 16" at 58.395,157.759 h1.5
  text "DM 04" at 65.761,157.759 h1.5
  text "CE" at 31.09,157.277 h0.8 r270
  text "SCK 14" at 58.42,155.854 h1.5
  text "00" at 68.91,155.829 h1.5
  text "MISO 12" at 58.445,153.848 h1.5
  text "LED 02" at 66.015,153.848 h1.5
  text "GND" at 41.707,153.213 h0.8 r90
  text "CSN 15" at 65.888,151.867 h1.5
  text "MOSI 13" at 58.496,151.74 h1.5
  text "GND" at 27.305,151.003 h0.8 r90
  text "8" at 54.458,149.962 h1.5
  text "IRQ" at 47.295,148.92 h0.8
  text "15" at 72.568,148.488 h1.2
  text "MISO" at 47.269,147.599 h0.8
  text "VCC" at 55.194,147.599 h1
  text "GND" at 71.399,147.295 h0.8
  text "MOSI" at 47.269,146.304 h0.8
  text "SCK" at 47.219,145.034 h0.8
  text "CSN" at 47.193,143.764 h0.8
  text "CE" at 47.193,142.494 h0.8
  text "GND" at 59.004,141.732 h1 r270
  text "TXD" at 64.033,141.732 h1 r270
  text "RXD" at 61.747,141.707 h1 r270
  text "GND" at 47.168,141.249 h0.8
  text "3V3" at 44.171,137.82 h0.8
  text "W-RST" at 64.567,124.714 h1
  text "DM" at 59.055,124.358 h1
  text "+" at 38.43,115.57 h2
  text "+" at 59.588,115.291 h2
  text "+" at 71.806,110.693 h2
  text "+" at 27.407,110.668 h2
  text "DC 5V 500mA" at 43.891,106.274 h1.2
  text "-" at 42.975,101.75 h2.2
  text "+" at 55.8,101.7 h2.2
Bottom Overlay:
  text "20190701HFCC" at 69.469,114.503 h1
  text "DC 5V 500mA" at 56.744,106.909 h1.2
  text "+" at 56.007,101.549 h2.7
  text "-" at 42.647,101.371 h2.7

## Dimensions
26.16,109.569 to 74.177,109.576 on Top Overlay
72.168,107.569 to 73.177,173.74 on Top Overlay